# Altium PCB MYO-BT.PcbDoc
Units mil, origin at the board's own origin, x right, y up, seen from the top; angles counter-clockwise.
Board outline 1870 x 1850 mil, 2 copper layers (Top Layer, Bottom Layer); 7 components, 6 nets, 47 pads, 0 vias.
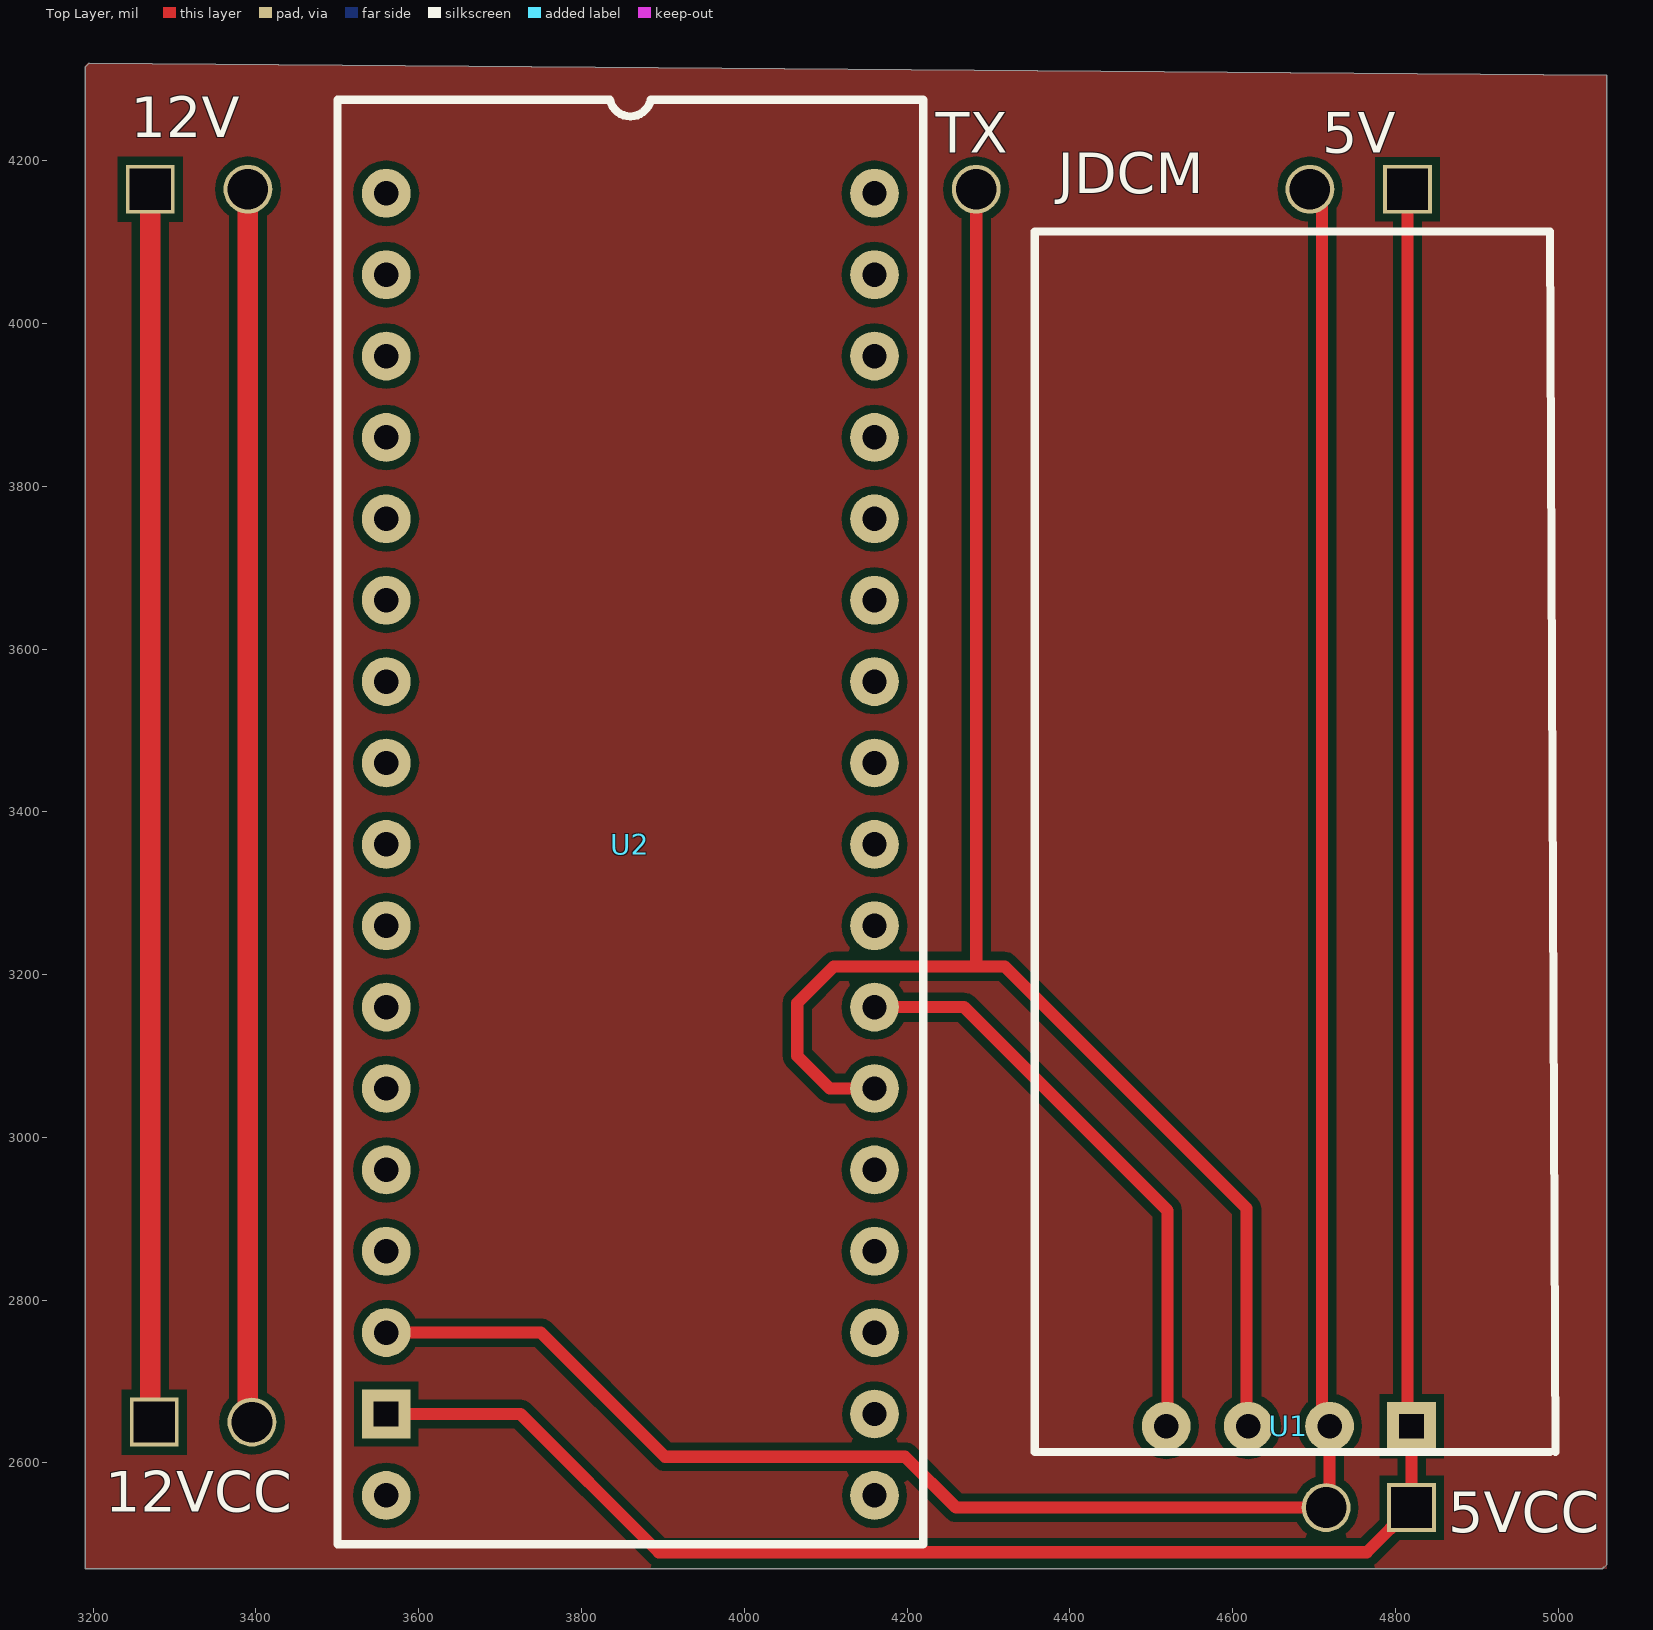
[diagram p0: Top Layer view]
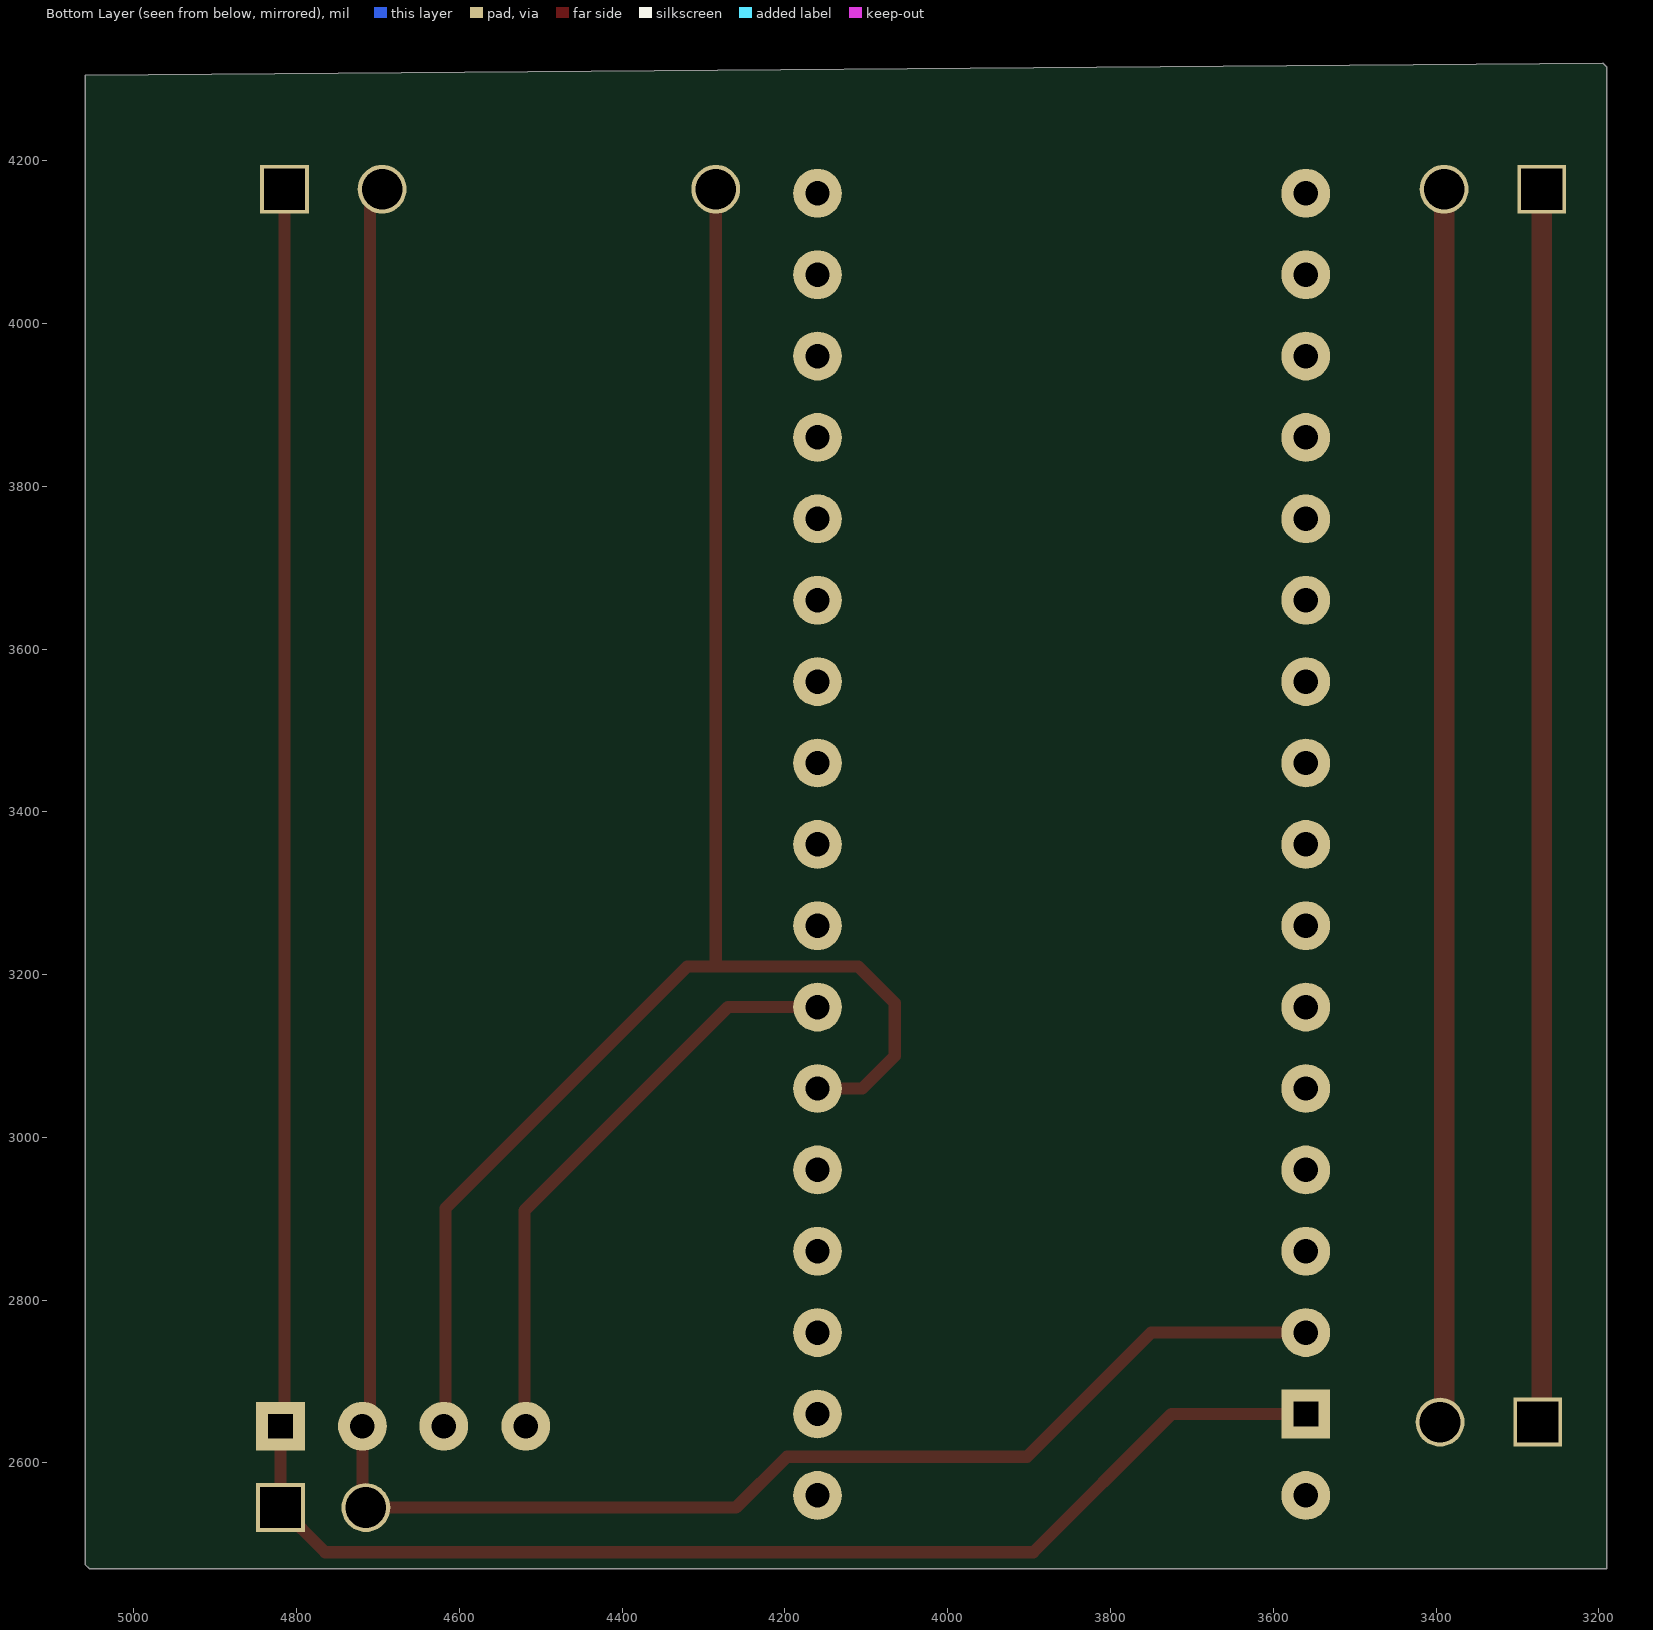
[diagram p1: Bottom Layer view, seen from below]

## Layer stack, top to bottom
Top Solder: solder mask 0.4, Solder Resist, Dk 3.5
Top Layer: signal copper 1.4
Dielectric 1: dielectric 12.6, FR-4, Dk 4.8
Bottom Layer: signal copper 1.4
Bottom Solder: solder mask 0.4, Solder Resist, Dk 3.5

## Board outline
3195,4320 3190,4315 3190,2470 5055,2470 5060,2475 5060,4305

## Design rules (kind name [scope] priority, off if disabled: settings)
Clearance [All] p1: gap=10 ignorepadtopadclearanceinfootprint=FALSE except(0: Arc-Hole Track-Hole SMDPad-Hole THPad-Hole Via-Hole Fill-Hole Poly-Hole Region-Hole Text-Hole)
PolygonConnect [All] p1: connectstyle=Relief reliefconductorwidth=10 reliefentries=4 polygonreliefangle="90 Angle" airgapwidth=10
RoutingVias [All] p1: holewidth=28 width=50 viastyle="Through Hole" minholewidth=28 minwidth=50 maxholewidth=28 maxwidth=50
SolderMaskExpansion [All] p1: expansion=4
Width [All] p1: maxlimit=25 minlimit=10 preferedwidth=15
30 further rules are at their usual default settings.

## Components (designator, comment, footprint, x,y, rotation, side; value= is the part's Value field where it differs from the comment)
5V "12V Output" Vout 4755,4165 r180 top (schematic designator 5Vout)
5VCC "Input 5V - Power Bank" 5VCC 4775,2545 r180 top
12V "12V Output" Vout 3330,4165 r0 top (schematic designator O2)
12VCC "Input 12V - Powerbank" 12VCC 3335,2650 r0 top
TX "Comm_Out" Comm_Out 4285,4165 r270 top (schematic designator O1)
U1 "HM-10" HM-10 4357.01,2613.5 r0 top
U2 "Arduino_Nano" "Arduino Nano" 3560,4210 r0 top

## Footprints (in the part's own frame and the unit in brackets; to place one, negate y for a bottom-side part, rotate by r counter-clockwise, add the part's x,y. Pads: shape width x height; smd on the part's side, far side on the other; paste and mask are expansions set on the pad)
5VCC [mil]
  rect 60x60 hole 50 square: 1(-45,0)
  round 60 hole 50: 2(60,0)
12VCC [mil]
  rect 60x60 hole 50 square: 1(-60,0)
  round 60 hole 50: 2(60,0)
"Arduino Nano" [mil]
  round 60 hole 30: 1(0,-50) 2(0,-150) 3(0,-250) 4(0,-350) 5(0,-450) 6(0,-550) 7(0,-650) 8(0,-750) 9(0,-850) 10(0,-950) 11(0,-1050) 12(0,-1150) 13(0,-1250) 14(0,-1350) 17(0,-1650) 18(600,-1650) 19(600,-1550) 20(600,-1450) 21(600,-1350) 22(600,-1250) 25(600,-950) 26(600,-850) 27(600,-750) 28(600,-650) 29(600,-550) 30(600,-450) 31(600,-350) 32(600,-250) 33(600,-150) 34(600,-50) GND(0,-1450) RXD(600,-1150) TXD(600,-1050)
  rect 60x60 hole 30 square: 5V(0,-1550)
  silkscreen extent -60,-1710 660,65
Comm_Out [mil]
  round 60 hole 50: 1(0,0)
HM-10 [mil]
  rect 60x60 hole 30 square: 1(462.99,31.5)
  round 60 hole 30: 2(362.2,31.5) 3(262.2,31.5) 4(161.42,31.5)
  silkscreen extent 0,0 640,1500
Vout [mil]
  rect 60x60 hole 50 square: 1(-60,0)
  round 60 hole 50: 2(60,0)

## Part data
U1: library part HM-10_Basic, "HM-10, just with necessary pins for this application"
U2: library part Arduino_Nano_Basic, "Arduino Nano with only the necessary pins for this application."

## Nets (pads, with @x,y where several pads share a name; then routed paths per layer and width w, separated by ;. In a path a pad name is that pad's centre, name@x,y a point inside that pad or via, vN(x,y) a via of type N, cw(c..) or ccw(c..) an arc to the next point about the centre after c; other vN are vias at no path point)
5V: 5V.1 5VCC.1 U1.1 U2.5V | length 2975.3
  Top Layer w15: U2.5V 3725,2660 3895,2490 4765,2490 5VCC.1 U1.1 4815,2650 5V.1
12V: 12V.1 12VCC.1 | length 1515
  Top Layer w25: 12VCC.1@3270,2650 12V.1
GND: 5V.2 5VCC.2 U1.2 U2.GND | length 2882.9
  Top Layer w10: U2.GND@3555,2765 U2.GND
  Top Layer w15: U2.GND 3750,2760 3902.5,2607.5 4197.5,2607.5 4260,2545 5VCC.2 4719.21,2549.21 U1.2 4719.21,2652.07 4710,2661.29 4710,4150 5V.2
GND_P: 12V.2 12VCC.2 | length 1527.1
  Top Layer w15: 12VCC.2@3390,2655 12VCC.2
  Top Layer w25: 12VCC.2@3390,2655 12V.2 ; 12VCC.2@3400,2640 12VCC.2@3400,2650
NetTX_1: TX.1 U1.3 U2.RXD | length 2095.4
  Top Layer w15: U2.RXD@4161.29,3060 U2.RXD 4105,3060 4065,3100 4065,3165 4110,3210 4285,3210 ; TX.1 4285,3210 ; U1.3 4617.2,2647.01 4617.2,2912.8 4320,3210 4285,3210
NetU1_4: U1.4 U2.TXD | length 729.2
  Top Layer w15: U2.TXD 4270,3160 4520,2910 4520,2646.57 U1.4
pads on no net: U2.1 U2.2 U2.3 U2.4 U2.5 U2.6 U2.7 U2.8 U2.9 U2.10 U2.11 U2.12 U2.13 U2.14 U2.17 U2.18 U2.19 U2.20 U2.21 U2.22 U2.25 U2.26 U2.27 U2.28 U2.29 U2.30 U2.31 U2.32 U2.33 U2.34
copper on no net: | length 13.2
  Top Layer w10: 4160,2660 4169.32,2650.68

## Polygon pours and split planes (outlines as drawn)
no net on Top Layer (solid, pour order 2): 3190,4320 3190,2470 5060,2470 5060,4305

## Silkscreen, mask and mechanical layers (free items; w line width, h text height)
Top Overlay:
  text "JDCM" at 4385,4160 h50